# Altium PCB PCB2.PcbDoc
Units mil, origin at the board's own origin, x right, y up, seen from the top; angles counter-clockwise.
Board outline 2545 x 2515 mil, 2 copper layers (Top Layer, Bottom Layer); 21 components, 18 nets, 87 pads, 0 vias.
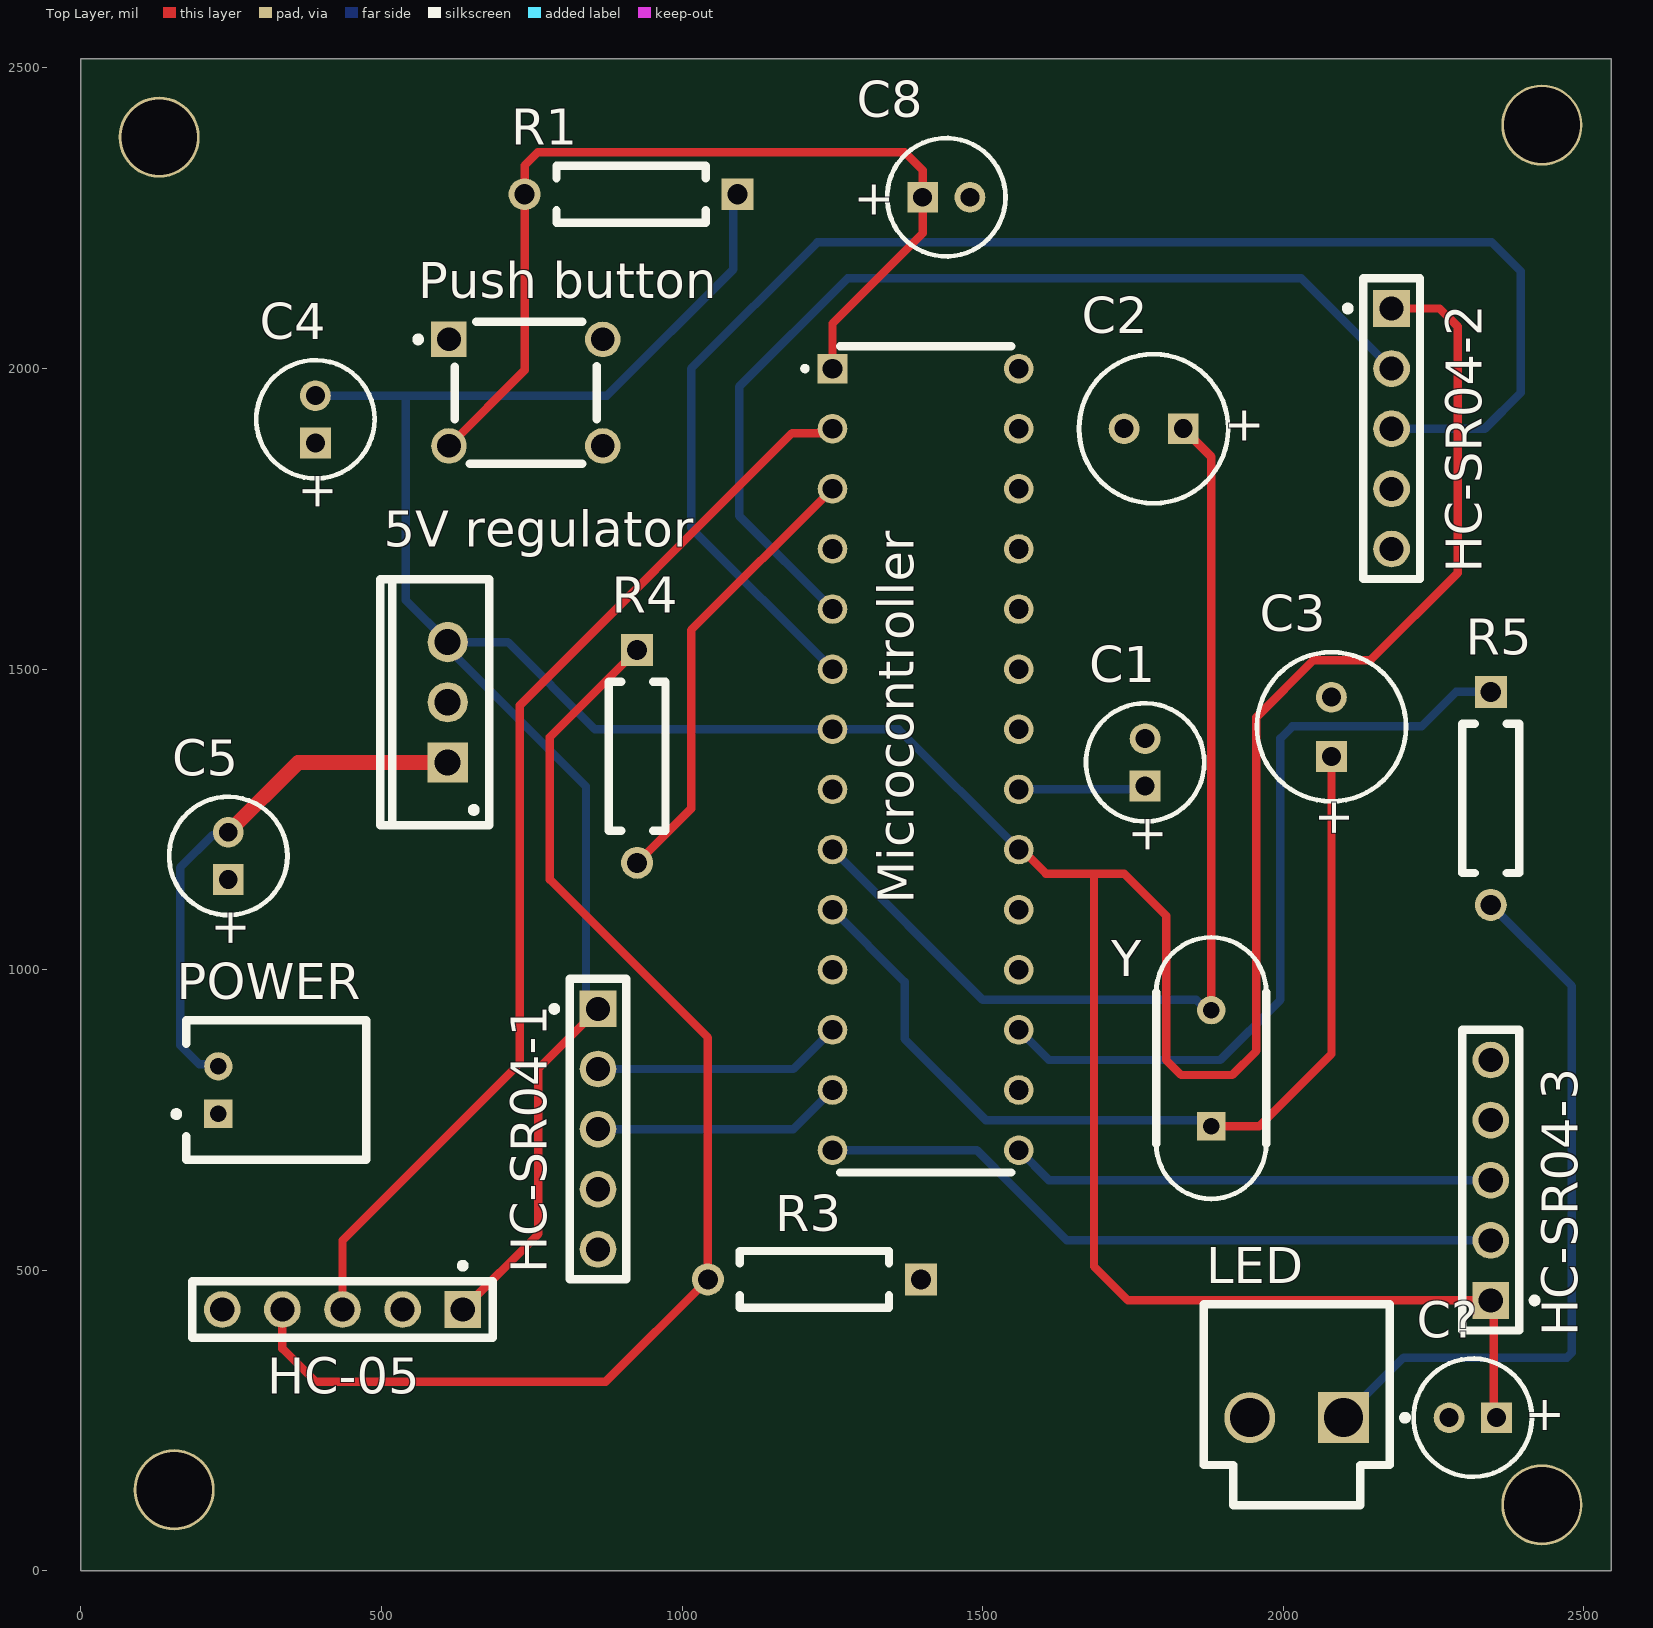
[diagram p0: Top Layer view]
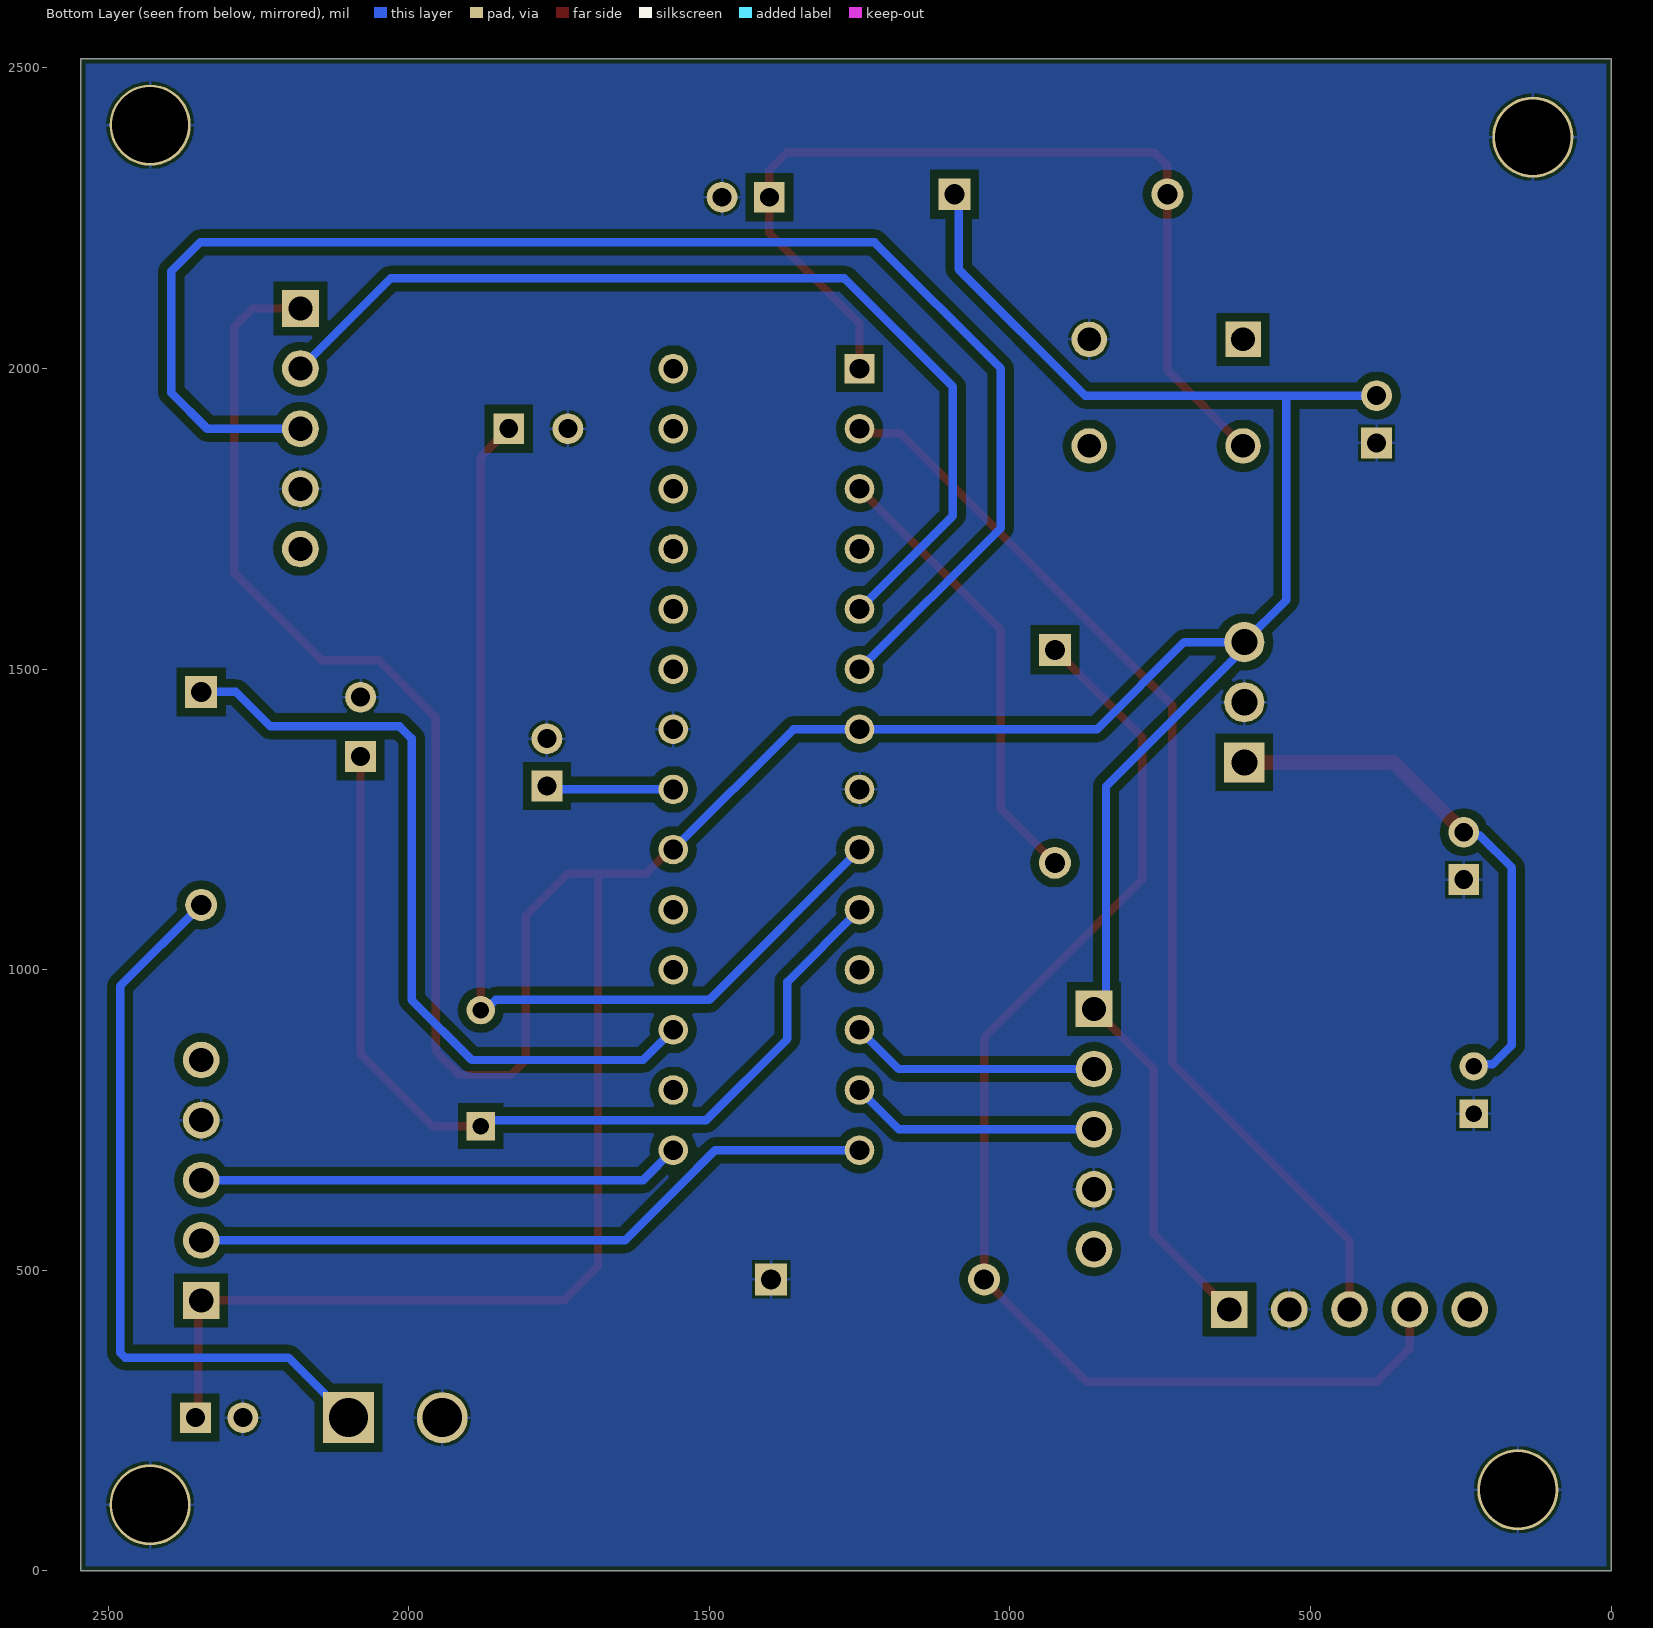
[diagram p1: Bottom Layer view, seen from below]

## Layer stack, top to bottom
Top Solder: solder mask 0.4, Solder Resist, Dk 3.5
Top Layer: signal copper 1.4
Dielectric 1: dielectric 12.6, FR-4, Dk 4.8
Bottom Layer: signal copper 1.4
Bottom Solder: solder mask 0.4, Solder Resist, Dk 3.5

## Board outline
0,0 2545,0 2545,2515 0,2515

## Design rules (kind name [scope] priority, off if disabled: settings)
BoardOutlineClearance [All] p1: gap=7.87 ignorepadtopadclearanceinfootprint=FALSE
Clearance [All] p1: gap=14 ignorepadtopadclearanceinfootprint=FALSE
ComponentClearance [All] p1: gap=5 collisioncheckmode=3 verticalgap=5 showdistances=TRUE
DiffPairsRouting [All] p1: maxlimit=10 minlimit=5 mostfreqgap=5 toplayer_minwidth=5 toplayer_maxwidth=1000 toplayer_prefwidth=5 bottomlayer_minwidth=5 bottomlayer_maxwidth=1000 bottomlayer_prefwidth=5 maxuncoupledlength=500
Height [All] p1: minheight=0 maxheight=71497.94 prefheight=500
HoleSize [All] p1: absolutevalues=TRUE maxlimit=248.03 minlimit=11.81 maxpercent=80.000 minpercent=20.000
HoleToHoleClearance [All] p1: gap=9.84 allowstackedmicrovias=FALSE
MinimumAnnularRing [All] p1: minimumring=3
MinimumSolderMaskSliver [All] p1: minsoldermaskwidth=0
PlaneClearance [All] p1: clearance=5
PlaneConnect PlaneConnectPowerPads [InPadClass('PowerPads')] p1: planeconnectstyle=Direct reliefexpansion=20 reliefentries=4 reliefconductorwidth=10 reliefairgap=10
PlaneConnect [All] p2: pad.planeconnectstyle=Relief pad.reliefexpansion=11.81 pad.reliefentries=4 pad.reliefconductorwidth=5 pad.reliefairgap=5 via.planeconnectstyle=Direct via.reliefexpansion=11.81 via.reliefentries=4 via.reliefconductorwidth=5 via.reliefairgap=5
PolygonConnect PolygonConnectPowerPads [All vs (InPadClass('PowerPads'))] p1: connectstyle=Direct reliefconductorwidth=10 reliefentries=4 polygonreliefangle="90 Angle" airgapwidth=10
PolygonConnect [All] p2: thpad.connectstyle=Relief thpad.reliefconductorwidth=5 thpad.reliefentries=4 thpad.polygonreliefangle="90 Angle" thpad.airgapwidth=5 smdpad.connectstyle=Relief smdpad.reliefconductorwidth=5 smdpad.reliefentries=4 smdpad.polygonreliefangle="90 Angle" smdpad.airgapwidth=5 via.connectstyle=Direct via.reliefconductorwidth=5 via.reliefentries=4 via.polygonreliefangle="90 Angle" via.airgapwidth=5
RoutingVias [All] p1: holewidth=11.81 width=23.62 viastyle="Through Hole" minholewidth=11.81 minwidth=23.62 maxholewidth=23.62 maxwidth=259.84
SilkToSilkClearance [All] p1: silktosilkclearance=0
SilkToSolderMaskClearance [IsPad] p1: minsilkscreentomaskgap=5 clearancetoexposedcopper=TRUE
SolderMaskExpansion [All] p1: expansion=2.95 istentingtop=FALSE
Width [All] p1: maxlimit=1000 minlimit=14 preferedwidth=25 minimp=50.000000 maximp=50.000000 favimp=50.000000
20 further rules are at their usual default settings.

## Components (designator, comment, footprint, x,y, rotation, side; value= is the part's Value field where it differs from the comment)
"5V regulator" "L7805CV" TO220 610,1445 r90 top
C1 "ECA1HM100" CAPPR55-200-1100X500X1200 1770,1345 r90 top value=10µF
C2 "ECA-2AM220" CAPPR55-250-1120X630X1220 1784.21,1900 r180 top value=22µF
C3 "ECA-2AM220" CAPPR55-250-1120X630X1220 2080,1404.21 r90 top value=22µF
C4 "ECA1HM100" CAPPR55-200-1100X500X1200 390,1915.63 r90 top value=10µF
C5 "ECA1HM100" CAPPR55-200-1100X500X1200 245,1189.37 r90 top value=10µF
C8 "ECA1HM100" CAPPR55-200-1100X500X1200 1439.37,2285 r0 top value=10µF
C? "ECA1HM100" CAPPR55-200-1100X500X1200 2315,255 r180 top value=10µF
HC-05 "77311-462K05LF" FCI-77311-5_V 435,435 r180 top
HC-SR04-1 "77311-462K05LF" FCI-77311-5_V 860,735 r270 top
HC-SR04-2 "77311-462K05LF" FCI-77311-5_V 2180,1900 r270 top
HC-SR04-3 "77311-462K05LF" FCI-77311-5_V 2345,650 r90 top
LED "" JST-B2P-VH(LF)(SN)_V 2022.05,310.12 r180 top
Microcontroller "ATMEGA328-PU" DIP787W46P254L3467H508Q28 1405,1350 r0 top
POWER "S2B-PH-K-S(LF)(SN)" JST-S2B-PH-K-S_V 325,800 r90 top
"Push button" "B3F-1000" OMRON-B3F-1000-4_V 740,1960 r0 top
R1 "MFR-25FBF52-221R" RESA60-630X240 915,2290 r180 top value=221
R3 "MFR-25FBF52-1K" RESA60-630X240 1220,485 r180 top
R4 "MFR-25FBF52-1K" RESA60-630X240 925,1355 r270 top value=1k
R5 "MFR-25FBF52-1K" RESA60-630X240 2345,1285 r270 top value=330
Y "HC-49US 16.000MHZ" JPY-HC-49US 1880,836.46 r90 top

## Footprints (in the part's own frame and the unit in brackets; to place one, negate y for a bottom-side part, rotate by r counter-clockwise, add the part's x,y. Pads: shape width x height; smd on the part's side, far side on the other; paste and mask are expansions set on the pad)
CAPPR55-200-1100X500X1200 [mm] "THD, 2-Leads, Dia 5mm, Pin Spacing 2mm"
  rect 1.3x1.3 hole 0.8: 1(-1,0)
  round 1.3 hole 0.8: 2(1,0)
  silkscreen extent -2.5,-2.5 2.5,2.5, body extent -2.5,-2.5 2.45,2.5, height 12
CAPPR55-250-1120X630X1220 [mm] "THD, 2-Leads, Dia 6.3mm, Pin Spacing 2.5mm"
  rect 1.3x1.3 hole 0.8: 1(-1.25,0)
  round 1.3 hole 0.8: 2(1.25,0)
  silkscreen extent -3.15,-3.15 3.15,3.15, body extent -3.15,-3.15 3.16,3.15, height 12.21
DIP787W46P254L3467H508Q28 [mm]
  rect 1.25x1.25 / inner round 1.25 / far side rect 1.25x1.25 hole 0.83: 1(-3.937,16.51)
  round 1.25 hole 0.83: 2(-3.937,13.97) 3(-3.937,11.43) 4(-3.937,8.89) 5(-3.937,6.35) 6(-3.937,3.81) 7(-3.937,1.27) 8(-3.937,-1.27) 9(-3.937,-3.81) 10(-3.937,-6.35) 11(-3.937,-8.89) 12(-3.937,-11.43) 13(-3.937,-13.97) 14(-3.937,-16.51) 15(3.937,-16.51) 16(3.937,-13.97) 17(3.937,-11.43) 18(3.937,-8.89) 19(3.937,-6.35) 20(3.937,-3.81) 21(3.937,-1.27) 22(3.937,1.27) 23(3.937,3.81) 24(3.937,6.35) 25(3.937,8.89) 26(3.937,11.43) 27(3.937,13.97) 28(3.937,16.51)
  silkscreen extent -5.2,-17.45 3.62,17.45, body extent -3.95,-17.34 3.95,17.34, height 4.57
FCI-77311-5_V [mm] "THD, 5-Leads, Body 12.7x2.4mm, Pitch 2.54mm"
  rect 1.55x1.55 hole 1.02: 1(-5.08,0)
  round 1.55 hole 1.02: 2(-2.54,0) 3(0,0) 4(2.54,0) 5(5.08,0)
  silkscreen extent -6.35,-1.97 6.35,1.2, body extent -6.35,-1.2 6.35,1.2, height 16.24
JPY-HC-49US [mm] "THD, 2-Leads, Body 11.05x4.65mm, Pitch 4.9mm"
  rect 1.2x1.2 hole 0.7: 1(-2.45,0)
  round 1.2 hole 0.7: 2(2.45,0)
  silkscreen extent -5.53,-2.33 5.53,2.33, body extent -5.53,-2.33 5.52,2.32, height 3.5
JST-B2P-VH(LF)(SN)_V [mm] "THD, 2-Leads, Body 8.5x7.86mm, Pitch 3.96mm"
  rect 2.15x2.15 hole 1.65: 1(-1.98,1.4)
  round 2.15 hole 1.65: 2(1.98,1.4)
  silkscreen extent -4.71,-3.4 3.93,5.1, body extent -3.93,-3.2 3.93,5.3, height 10.9
JST-S2B-PH-K-S_V [mm] "THD, 2-Leads, Body 7.6x5.9mm, Pitch 2mm"
  rect 1.2x1.2 hole 0.7: 1(-1,2.45)
  round 1.2 hole 0.7: 2(1,2.45)
  silkscreen extent -2.95,-3.8 2.95,4.35, body extent -2.95,-3.8 2.95,3.8, height 4.8
OMRON-B3F-1000-4_V [mm] "TH, 4-Leads, Body 6x6mm"
  rect 1.5x1.5 hole 1 paste+0: 1(-3.25,2.25)
  round 1.5 hole 1 paste+0: 2(3.25,2.25) 4(3.25,-2.25)
  round 1.5 hole 1 paste+0 mask+0.102: 3(-3.25,-2.25)
  silkscreen extent -4.67,-3 3,3, body extent -3.4,-3 3.4,3, height 4.5
RESA60-630X240 [mm] "Axial Resistor, 2-Leads, Dia 2.4mm, Body Length 6.3mm"
  rect 1.35x1.35 hole 0.85: 1(-4.5,0)
  round 1.35 hole 0.85: 2(4.5,0)
  silkscreen extent -3.15,-1.2 3.15,1.2, body extent -4.77,-1.19 4.77,1.2, height 2.4
TO220 [mm] "TO, Thru-Hole, Vertical, Heatsink Mounted; 3 In-Line Leads; Pitch 2.54 mm"
  rect 1.7x1.7 hole 1.1: 1(-2.54,0)
  round 1.7 hole 1.1: 2(0,0) 3(2.54,0)
  silkscreen extent -5.2,-1.75 5.2,2.85, body extent -5.25,-1.8 5.25,2.9, height 19.7

## Part data
"5V regulator": library part CMP-019-00018-3, "Positive Voltage Regulator IC, 1.5 A, 5 V, 0 to 125 degC, 3-Pin TO-220, RoHS, Tube", Case/Package=TO-220, Dropout Voltage=2V, Manufacturer=STMicroelectronics, Max Input Voltage=35V, Max Operating Temperature=125°C, Max Ouput Current=1.5A, Max Supply Voltage=20V, Min Input Voltage=7V, Min Operating Temperature=0°C, Min Supply Voltage=8V, Nominal Output Voltage=5V, Package Quantity=50, Datasheet URL=https://datasheet.ciiva.com/15111/getdatasheetpartid-44136-15111027.pdf, Datasheet Version="Rev 30, 09/2012", Manufacturer URL=http://www.st.com/, Mounting Technology=TH, Output Current=1.5A, Output Voltage=5V, Outputs=1, Packaging=Rail/Tube, Pins=3, RoHS Compliant=True
C1 C4 C5 C8 C?: library part CMP-001-00025-7, "Aluminum Electrolytic Capacitor, 10 uF, +/- 20%, 50 V, -40 to 85 degC, 2-Pin THD, RoHS, Bulk", Capacitor Type=Electrolytic, Case/Package=Radial, Manufacturer=Panasonic, Max Operating Temperature=85°C, Min Operating Temperature=-40°C, Package Description="2-Pin Radial Lead, Dia 5 mm, Height 12 mm", Package Quantity=200, Package Reference=CAPPR55-200-1100X500X1200, Ripple Current=65mA, Tolerance=20%, Voltage Rating=50V, Datasheet URL=https://industrial.panasonic.com/cdbs/www-data/pdf/RDF0000/ABA0000C1218.pdf, Datasheet Version="Rev. 05, 10/2016", Diameter=5mm, Lead Pitch=2mm, Manufacturer URL=http://www.panasonic.com/, Mounting Technology=TH, Packaging=Bulk, Pins=2, Ripple Current (AC)=65mA, RoHS Compliant=True
C2 C3: library part CMP-001-00035-7, "Aluminum Electrolytic Capacitor, 22 uF, +/- 20%, 100 V, -40 to 85 degC, 2-Pin THD, RoHS, Bulk", Capacitor Type=Electrolytic, Case/Package=Radial, Manufacturer=Panasonic, Max Operating Temperature=85°C, Min Operating Temperature=-40°C, Package Description="2-Pin Radial Lead, Dia 6.3 mm, Height 12.2 mm", Package Quantity=200, Package Reference=CAPPR55-250-1120X630X1220, Ripple Current=115mA, Tolerance=20%, Voltage Rating=100V, Datasheet URL=https://industrial.panasonic.com/cdbs/www-data/pdf/RDF0000/ABA0000C1047.pdf, Datasheet Version=Mar-16, Diameter=6.3mm, Lead Pitch=2.5mm, Manufacturer URL=http://www.panasonic.com/, Mounting Technology=TH, Packaging=Bulk, Pins=2, Ripple Current (AC)=115mA, RoHS Compliant=True
HC-05 HC-SR04-1 HC-SR04-2 HC-SR04-3: library part CMP-002-00021-2, "Male Header, Pitch 2.54 mm, 1 x 5 Position, Height 16.24 mm, Tail Length 3.05 mm, -65 to 125 degC, RoHS, Tape and Reel", Case/Package=77311-5, Manufacturer="FCI Electronics", Package Description="Male Header, Pitch 2.54 mm, 1 x 5 Position, Height 16.24 mm, Tail Length 3.05 mm", Connector Type=Header, Datasheet URL=http://portal.fciconnect.com/Comergent//fci/drawing/77311.pdf, Datasheet Version="Rev. CK, 07/2016", Gender=Male, Manufacturer URL=http://portal.fciconnect.com/, Mounting Technology=TH, Package Reference=77311-5, RoHS Compliant=Unknown
LED: library part CMP-002-00025-2, "Male Header, Pitch 3.96 mm, 1 x 2 Position, Height 10.9 mm, Tail Length 3.7 mm, -25 to 85 degC, RoHS, Bulk", Case/Package=B2P-VH(LF)(SN), Manufacturer=JST, Max Operating Temperature=85°C, Min Operating Temperature=-25°C, Package Description="Male Header, Pitch 3.96 mm, 1 x 2 Position, Height 10.9 mm, Tail Length 3.7 mm", Connector Type=Header, Datasheet URL=http://www.jst-mfg.com/product/pdf/eng/eVH.pdf, Datasheet Version=May-16, Gender=Male, Manufacturer URL=http://www.jst.com/home2.html, Mounting Technology=TH, Package Reference=B2P-VH(LF)(SN), RoHS Compliant=Unknown
Microcontroller: "AVR AVRÂ® ATmega Microcontroller IC 8-Bit 20MHz 32KB (16K x 16) FLASH 28-PDIP", Package="DIP-28 Microchip Technology", Availability="In Stock", Check_prices=https://www.snapeda.com/parts/ATMEGA328-PU/Microchip/view-part/?ref=eda, MF=Microchip, MP=ATMEGA328-PU, Price=None, Purchase-URL=https://pricing.snapeda.com/search/part/ATMEGA328-PU/?ref=eda, SnapEDA_Link=https://www.snapeda.com/parts/ATMEGA328-PU/Microchip/view-part/?ref=snap
POWER: library part CMP-002-00030-2, "Male Header, Pitch 2 mm, 1 x 2 Position, Height 4.8 mm, Tail Length 3.4 mm, -25 to 85 degC, RoHS, Bulk", Case/Package=S2B-PH-K-S, Manufacturer="Japan Solderless Terminals", Max Operating Temperature=85°C, Min Operating Temperature=-25°C, Package Description="Male Header, Pitch 2 mm, 1 x 2 Position, Height 4.8 mm, Tail Length 3.4 mm", Connector Type=Header, Datasheet URL=http://www.jst-mfg.com/product/pdf/eng/ePH.pdf, Datasheet Version=Dec-12, Gender=Male, Mounting Technology=SM, Package Reference=S2B-PH-K-S, RoHS Compliant=Unknown
"Push button": library part CMP-011-00004-2, "Tactile Switch, SPST-NO, 0.05 A, 24 V, -25 to 70 degC, 4-Pin THD, RoHS, Bulk", Contact Current Rating=50mA, Manufacturer="Omron Electronic Components", Max Contact Resistance=100mohm, Max Operating Temperature=70°C, Max Voltage Rating (DC)=24V, Min Operating Temperature=-25°C, Operating Force=100gf, Package Description="4-Pin Through Hole Device, Body 6 x 6 mm", Package Quantity=1500, Resistance=0.1Ohm, Case/Package=B3F-1000, Contact Material=Gold, Contact Plating=Gold, Current Rating=50mA, Datasheet URL=http://www.omron.com/ecb/products/pdf/en-b3f.pdf, Datasheet Version=Jan-15, Manufacturer URL=http://www.omron.com/, Max Current Rating=50mA, Mounting Technology=TH, Package Reference=B3F-1000, Packaging=Bulk, Pins=4, RoHS Compliant=True, Throw Configuration=SPST, Voltage Rating=24V, Voltage Rating (DC)=24V
R1: library part CMP-009-00051-4, "Axial Resistor, 221 Ohm, +/- 1%, 250 mW, -55 to 155 degC, 2-Pin THD, RoHS, Bulk", Case/Package=Axial, Manufacturer=Yageo, Max Operating Temperature=155°C, Min Operating Temperature=-55°C, Package Description="2-Pin Axial Lead, Dia 2.4 mm, Body Length 6.3 mm", Package Quantity=200, Package Reference=MFR-25, Power=250mW, Tolerance=1%, Voltage Rating=250V, Datasheet URL=http://www.yageo.com/documents/recent/Yageo%20LR_MFR_2013.pdf, Datasheet Version=Apr-13, Manufacturer URL=http://www.yageo.com/, Mounting Technology=TH, Packaging=Bulk, RoHS Compliant=True
R3 R4 R5: library part CMP-009-00048-4, "Axial Resistor, 1 KOhm, +/- 1%, 250 mW, -55 to 155 degC, 2-Pin THD, RoHS, Bulk", Case/Package=Axial, Manufacturer=Yageo, Max Operating Temperature=155°C, Min Operating Temperature=-55°C, Package Description="2-Pin Axial Lead, Dia 2.4 mm, Body Length 6.3 mm", Package Quantity=200, Package Reference=MFR-25, Power=250mW, Tolerance=1%, Voltage Rating=250V, Composition=CarbonFilm, Datasheet URL=http://www.yageo.com/documents/recent/Yageo%20LR_MFR_2013.pdf, Datasheet Version=Apr-13, Manufacturer URL=http://www.yageo.com/, Mounting Technology=TH, Packaging=Bulk, RoHS Compliant=True
  R3: R3=2k
Y: library part CMP-003-00005-2, "Crystal, 16 MHz, +/- 30 ppm, 18 pF, -20 to 70 degC, 2-Pin THD", Case/Package=HC-49US, Frequency=16MHz, Manufacturer="Jing peng yuan", Package Description="2-Pin Throug Hole Device, Body 11.05 x 4.65 mm, Pitch 4.9 mm", Datasheet URL=https://statics3.seeedstudio.com/images/opl/datasheet/306010014.pdf, Datasheet Version=May-15, Mounting Technology=TH, Package Reference=HC-49US, RoHS Compliant=Unknown

## Free pads (board coordinates)
  round 135 hole 126: 2(130,2385) 3(155,135) 4(2430,110) 5(2430,2405)

## Nets (pads, with @x,y where several pads share a name; then routed paths per layer and width w, separated by ;. In a path a pad name is that pad's centre, name@x,y a point inside that pad or via, vN(x,y) a via of type N, cw(c..) or ccw(c..) an arc to the next point about the centre after c; other vN are vias at no path point)
+5: "5V regulator.3" C4.2 C?.1 HC-05.1 HC-SR04-1.1 HC-SR04-2.1 HC-SR04-3.1 Microcontroller.7 Microcontroller.20 R1.1 | length 7513.7
  Top Layer w14: HC-05.1 760.75,560.75 760.75,835.75 HC-SR04-1.1 ; Microcontroller.20 1565,1200 1605,1160 1685,1160 ; HC-SR04-2.1 2260,2100 2290,2070 2290,1660 2145,1515 2050,1515 1955,1420 1955,865 1915,825 1830,825 1805,850 1805,1090 1735,1160 1685,1160 ; HC-SR04-3.1 1741.5,450 1685,506.5 1685,1160 ; C?.1@2349.69,259.68 HC-SR04-3.1@2349.69,445.32
  Top Layer w25: HC-SR04-3.1 HC-SR04-3.1@2349.69,445.32 ; C?.1@2349.69,259.68 C?.1
  Bottom Layer w14: C4.2 540,1955 ; HC-SR04-1.1 840,955 840,1305 618.04,1526.96 618.04,1536.96 610,1545 ; R1.1 1085,2282.83 1085,2165 875,1955 540,1955 ; Microcontroller.20 1360,1400 Microcontroller.7 855,1400 710,1545 610,1545 ; 540,1955 540,1615 610,1545
GND: "5V regulator.2" "Push button.2" C1.2 C2.2 C3.2 C4.1 C5.1 C8.2 C?.2 HC-05.2 HC-SR04-1.4 HC-SR04-2.4 HC-SR04-3.4 LED.2 Microcontroller.8 Microcontroller.22 pad.2 pad.3 pad.4 pad.5 POWER.1 R3.1 | length 2.5
  Top Layer w14: LED.2@1966.55,260 LED.2@1969.09,260
"Net5V regulator_1": "5V regulator.1" C5.2 POWER.2 | length 891
  Top Layer w25: C5.2 361.26,1345 610,1345
  Bottom Layer w14: POWER.2@222.52,839.37 219.11,842.79 196.86,842.79 165,874.64 165,1170 218.73,1223.73 C5.2@239.99,1223.73
  Bottom Layer w25: POWER.2@222.52,839.37 POWER.2 ; C5.2@239.99,1223.73 C5.2
NetC1_1: C1.1 Microcontroller.21 | length 212.3
  Bottom Layer w14: Microcontroller.21 1764.37,1300 C1.1
NetC2_1: C2.1 Microcontroller.9 Y.2 | length 1727
  Top Layer w14: C2.1 1880,1853.43 Y.2
  Bottom Layer w14: Microcontroller.9 1500,950 1855.18,950 1872.26,932.91 Y.2
NetC3_1: C3.1 Microcontroller.10 Y.1 | length 1579.5
  Top Layer w14: Y.1 1960,740 2080,860 C3.1
  Bottom Layer w14: Microcontroller.10 1370,980 1370,885 1505,750 1870,750 Y.1
NetHC-05_3: HC-05.3 Microcontroller.2 | length 1837.7
  Top Layer w14: HC-05.3 435,550 730,845 730,1440 1182.76,1892.76 1242.76,1892.76 Microcontroller.2
NetHC-05_4: HC-05.4 R3.2 R4.1 | length 2082.1
  Top Layer w14: HC-05.4 335,370 390,315 872.83,315 R3.2 1042.83,887.17 780,1150 780,1387.17 R4.1
NetLED_1: LED.1 R5.2 | length 1225.4
  Bottom Layer w14: LED.1 2200,355 2471.8,355 2480,363.2 2480,972.83 R5.2
NetMicrocontroller_3: Microcontroller.3 R4.2 | length 756.8
  Top Layer w14: R4.2 1015,1267.83 1015,1565 Microcontroller.3
NetMicrocontroller_17: Microcontroller.17 R5.1 | length 1314.1
  Bottom Layer w14: Microcontroller.17 1610,850 1895,850 1995,950 1995,1385 2015,1405 2230,1405 2287.17,1462.17 R5.1
PB0: HC-SR04-3.2 Microcontroller.14 | length 1157.1
  Bottom Layer w14: Microcontroller.14 1490,700 1552.09,637.91 1640,550 HC-SR04-3.2
PB1: HC-SR04-3.3 Microcontroller.15 | length 805.7
  Bottom Layer w14: Microcontroller.15 1610,650 HC-SR04-3.3
PD3: HC-SR04-2.2 Microcontroller.5 | length 1655.9
  Bottom Layer w14: Microcontroller.5 1095,1755 1095,1970 1275,2150 2030,2150 HC-SR04-2.2
PD4: HC-SR04-2.3 Microcontroller.6 | length 2525.9
  Bottom Layer w14: Microcontroller.6 1015,1735 1015,2000 1225,2210 2346.8,2210 2395,2161.8 2395,1960 2335,1900 HC-SR04-2.3
PD6: HC-SR04-1.2 Microcontroller.12 | length 416.9
  Bottom Layer w14: HC-SR04-1.2 1185,835 Microcontroller.12
PD7: HC-SR04-1.3 Microcontroller.13 | length 416.9
  Bottom Layer w14: HC-SR04-1.3 1185,735 Microcontroller.13
RESET: "Push button.3" C8.1 Microcontroller.1 R1.2 | length 1594.4
  Top Layer w14: 612.05,1871.42 737.83,1997.2 R1.2 737.83,2337.83 760,2360 1370,2360 1400,2330 C8.1 1400,2225 1250,2075 Microcontroller.1
pads on no net: "Push button.1" "Push button.4" HC-05.5 HC-SR04-1.5 HC-SR04-2.5 HC-SR04-3.5 Microcontroller.4 Microcontroller.11 Microcontroller.16 Microcontroller.18 Microcontroller.19 Microcontroller.23 Microcontroller.24 Microcontroller.25 Microcontroller.26 Microcontroller.27 Microcontroller.28

## Polygon pours and split planes (outlines as drawn)
GND on Bottom Layer "GND_L02_P001" (solid, pour order 1): 0,0 2545,0 2545,2515 0,2515

## Silkscreen, mask and mechanical layers (free items; w line width, h text height)
Mechanical 13:
  lines w10: 0,2505 0,2515 ; 0,2515 5,2510 2540,2510 2540,5 0,5 0,2515

## Text inside footprints (layer, text, board x,y; h text height)
C1: Top Overlay "+" at 1799.02,1191.14 h59.06 r90
C2: Top Overlay "+" at 1969.24,1929.53 h59.06 r180
C3: Top Overlay "+" at 2109.53,1219.19 h59.06 r90
C4: Top Overlay "+" at 419.02,1761.77 h59.06 r90
C5: Top Overlay "+" at 274.02,1035.51 h59.06 r90
C8: Top Overlay "+" at 1285.51,2255.98 h59.06
C?: Top Overlay "+" at 2468.86,284.02 h59.06 r180